# Altium PCB add.PcbDoc
Units mm, origin at the board's own origin, x right, y up, seen from the top; angles counter-clockwise.
Board outline 51.56 x 56.26 mm, 2 copper layers (Top Layer, Bottom Layer); 11 components, 29 nets, 77 pads, 0 vias.
Unrouted connection lines stored in the file: 2.
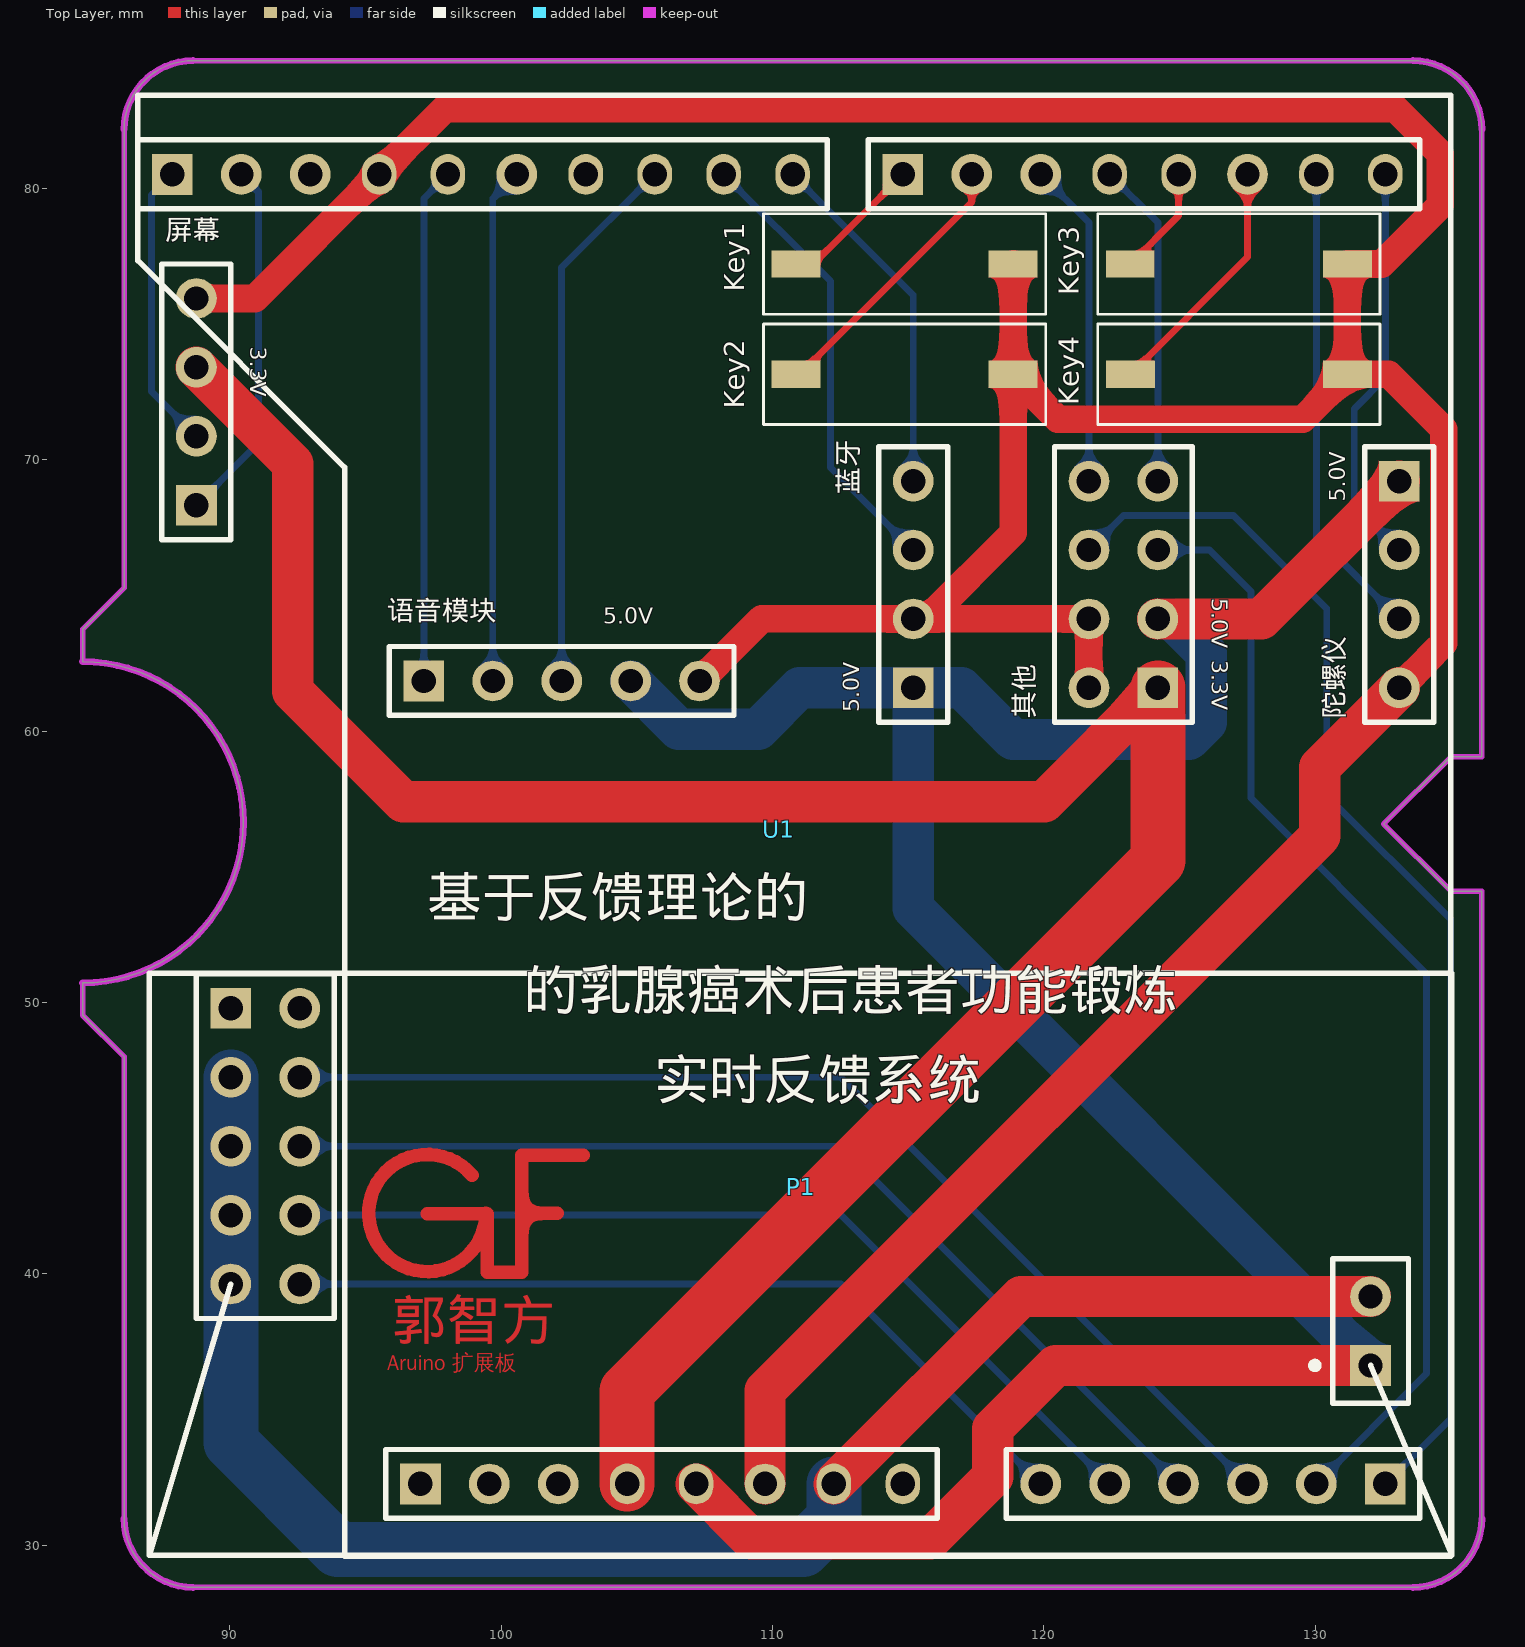
[diagram p0: Top Layer view]
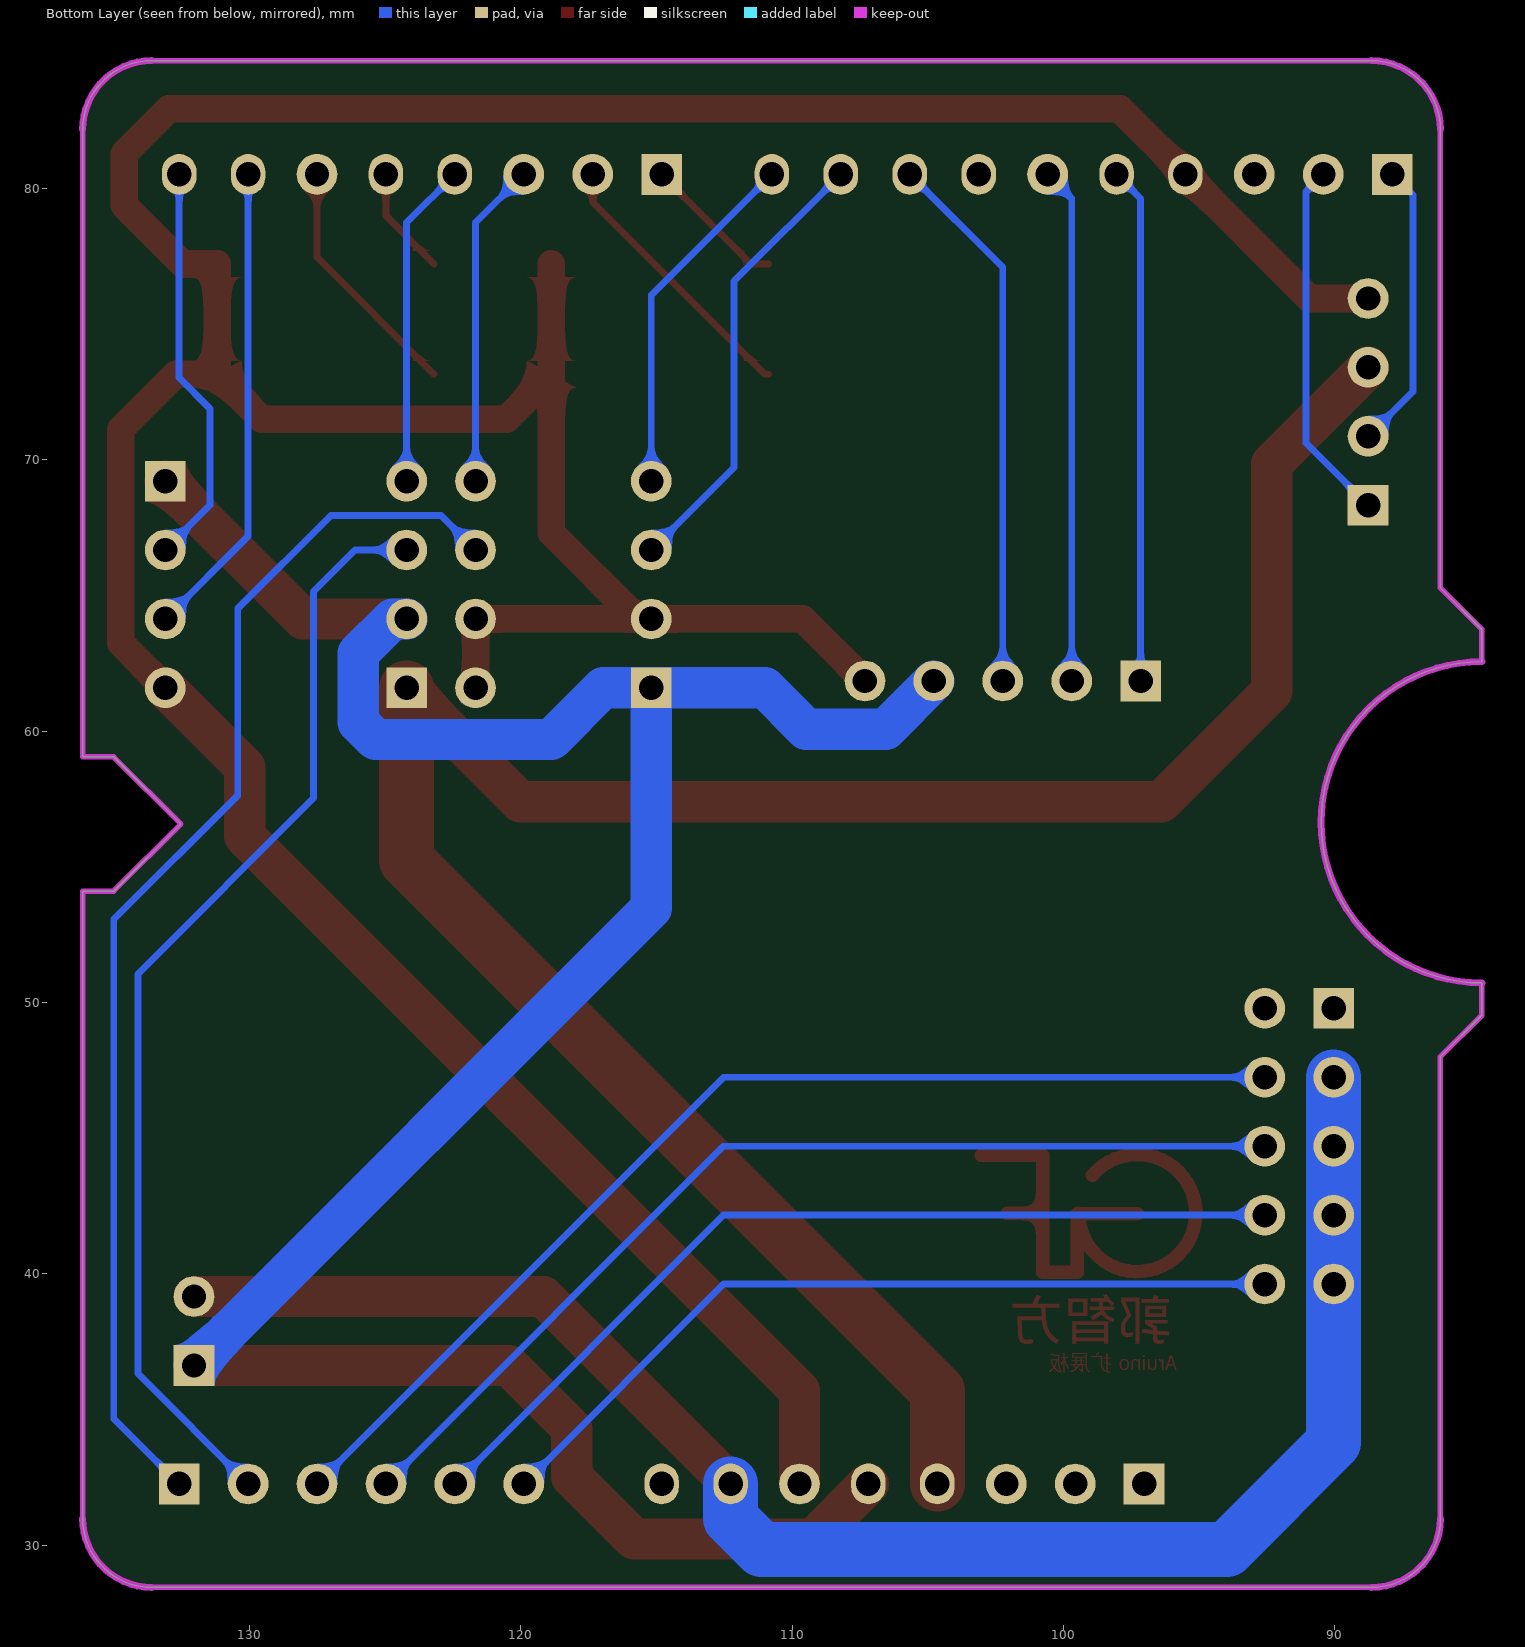
[diagram p1: Bottom Layer view, seen from below]

## Layer stack, top to bottom
Top Solder: solder mask 0.0102, Solder Resist, Dk 3.5
Top Layer: signal copper 0.0356
Dielectric 1: dielectric 0.32, FR-4, Dk 4.8
Bottom Layer: signal copper 0.0356
Bottom Solder: solder mask 0.0102, Solder Resist, Dk 3.5

## Board outline
84.582,49.53 86.106,48.006 86.106,30.988 ccw(c88.646,30.988) 88.646,28.448 133.604,28.448 ccw(c133.604,30.988) 136.144,30.988 136.144,54.102 135.001,54.102 132.524,56.578 135.001,59.055 136.144,59.055 136.144,82.169 ccw(c133.604,82.169) 133.604,84.709 88.646,84.709 ccw(c88.646,82.169) 86.106,82.169 86.106,65.278 84.582,63.754 84.582,62.562 cw(c84.582,56.642) 84.582,50.722

## Design rules (kind name [scope] priority, off if disabled: settings)
Clearance [All] p1: gap=0.254 ignorepadtopadclearanceinfootprint=FALSE except(0: Arc-Hole Track-Hole SMDPad-Hole THPad-Hole Via-Hole Fill-Hole Poly-Hole Region-Hole Text-Hole)
PolygonConnect [All] p1: connectstyle=Relief reliefconductorwidth=0.254 reliefentries=4 polygonreliefangle="90 Angle" airgapwidth=0.254
RoutingVias [All] p1: holewidth=0.711 width=1.27 viastyle="Through Hole" minholewidth=0.711 minwidth=1.27 maxholewidth=0.711 maxwidth=1.27
SolderMaskExpansion [All] p1: expansion=0.102
Width [All] p1: maxlimit=2.54 minlimit=0.254 preferedwidth=0.254
30 further rules are at their usual default settings.

## Components (designator, comment, footprint, x,y, rotation, side; value= is the part's Value field where it differs from the comment)
Key1 "" Key2 110.872,77.216 r0 top
Key2 "" Key2 110.872,73.152 r0 top
Key3 "" Key2 123.19,77.216 r0 top
Key4 "" Key2 123.191,73.152 r0 top
P1 "YL" YL 87.043,29.624 r0 top locked
U1 "ATMEGA328P_32LQFP" ATM 115.57,64.77 r0 top locked
其他 "PIN" HDR2X4 124.206,61.595 r90 top (schematic designator P6)
屏幕 "Screen" HDR1X4 88.773,68.326 r90 top (schematic designator P4)
蓝牙 "Bluetooth" HDR1X4 115.189,61.595 r90 top (schematic designator P5)
语音模块 "MP3" HDR1X5 97.155,61.849 r0 top (schematic designator P2)
陀螺仪 "Gyro" HDR1X4 133.096,69.215 r270 top (schematic designator P3)

## Footprints (in the part's own frame and the unit in brackets; to place one, negate y for a bottom-side part, rotate by r counter-clockwise, add the part's x,y. Pads: shape width x height; smd on the part's side, far side on the other; paste and mask are expansions set on the pad)
ATM [mm]
  rect 1.5x1.5 hole 0.9: 1(-18.542,-32.512) 14(17.018,-32.512) 22(-0.762,15.748) 32(-27.686,15.748)
  round 1.5 hole 0.9: 2(-16.002,-32.512) 3(-13.462,-32.512) 6(-5.842,-32.512) 9(4.318,-32.512) 10(6.858,-32.512) 11(9.398,-32.512) 12(11.938,-32.512) 13(14.478,-32.512) 17(11.938,15.748) 20(4.318,15.748) 21(1.778,15.748) 27(-14.986,15.748) 30(-22.606,15.748) 31(-25.146,15.748)
  oval 1.27x1.5 hole 0.9: 4(-10.922,-32.512) 5(-8.382,-32.512) 7(-3.302,-32.512) 8(-0.762,-32.512) 15(17.018,15.748) 16(14.478,15.748) 18(9.398,15.748) 19(6.858,15.748) 23(-4.826,15.748) 24(-7.366,15.748) 25(-9.906,15.748) 26(-12.446,15.748) 28(-17.526,15.748) 29(-20.066,15.748)
  silkscreen extent -28.96,-35.18 19.43,18.67, body extent -28.96,-33.76 18.29,17, height 8.65
HDR1X4 [mm] "Connector; Header; 4 Position"
  rect 1.5x1.5 hole 0.9: 1(0,0)
  round 1.5 hole 0.9: 2(2.54,0) 3(5.08,0) 4(7.62,0)
  silkscreen extent -1.27,-1.27 8.89,1.27
HDR1X5 [mm] "Connector; Header; 5 Position"
  rect 1.5x1.5 hole 0.9: 1(0,0)
  round 1.5 hole 0.9: 2(2.54,0) 3(5.08,0) 4(7.62,0) 5(10.16,0)
  silkscreen extent -1.27,-1.27 11.43,1.27
HDR2X4 [mm] "Connector; Header; 4x2 Position"
  rect 1.5x1.5 hole 0.9: 1(0,0)
  round 1.5 hole 0.9: 2(0,2.54) 3(2.54,0) 4(2.54,2.54) 5(5.08,0) 6(5.08,2.54) 7(7.62,0) 8(7.62,2.54)
  silkscreen extent -1.27,-1.27 8.89,3.81
Key2 [mm]
  rect 1.8x1 smd: 1(0,0) 2(8,0)
  silkscreen extent -1.2,-1.85 9.2,1.85
YL [mm]
  rect 1.5x1.5 hole 0.9: 1(45,7) 12(3,20.16)
  round 1.5 hole 0.9: 2(45,9.54) 3(5.54,10) 4(5.54,12.54) 5(5.54,15.08) 6(5.54,17.62) 7(5.54,20.16) 8(3,10) 9(3,12.54) 10(3,15.08) 11(3,17.62)
  silkscreen extent 0,0 48,21.46

## Part data
Key1 Key2 Key3 Key4: library part SW-PB, "Switch", LatestRevisionDate=17-Jul-2002, LatestRevisionNote="Re-released for DXP Platform.", PackageDescription="Switch; 2 Leads", PackageReference=SPST-2, Published=24-Mar-1999, Publisher="Altium Limited"
其他: library part "Header 8", "Header, 8-Pin", LatestRevisionDate=17-Jul-2002, LatestRevisionNote="Re-released for DXP Platform.", Publisher="Altium Limited"
屏幕 蓝牙 语音模块 陀螺仪: library part "Header 4", "Header, 4-Pin", LatestRevisionDate=17-Jul-2002, LatestRevisionNote="Re-released for DXP Platform.", Publisher="Altium Limited"

## Nets (pads, with @x,y where several pads share a name; then routed paths per layer and width w, separated by ;. In a path a pad name is that pad's centre, name@x,y a point inside that pad or via, vN(x,y) a via of type N, cw(c..) or ccw(c..) an arc to the next point about the centre after c; other vN are vias at no path point)
2: Key4.1 U1.17 | length 9.2
  Top Layer w0.254: Key4.1 127.508,77.469 U1.17
3: Key3.1 U1.18 | length 4
  Top Layer w0.254: Key3.1 124.968,78.994 U1.18
3.3V: U1.4 其他.1 屏幕.3 | length 86.1
  Top Layer w1.524: 屏幕.3 92.329,69.85 92.329,61.468 96.393,57.404 120.015,57.404 其他.1
  Top Layer w2.032: U1.4 104.648,35.687 124.206,55.245 其他.1
4: U1.19 其他.7 | length 12
  Bottom Layer w0.254: U1.19 124.206,78.74 其他.7
5: U1.20 其他.8 | length 12
  Bottom Layer w0.254: U1.20 121.666,78.74 其他.8
5.0V: P1.1 U1.2 U1.5 其他.3 蓝牙.1 语音模块.4 陀螺仪.1 | length 100.8
  Top Layer w1.524: U1.5 109.22,30.226 115.824,30.226 118.122,32.524 118.122,34.302 120.444,36.624 P1.1 ; 其他.3 128.016,64.135 陀螺仪.1
  Bottom Layer w1.524: 语音模块.4 106.553,60.071 109.474,60.071 110.998,61.595 蓝牙.1 ; 其他.3 124.714,64.135 125.984,62.865 125.984,60.325 125.349,59.69 118.872,59.69 116.967,61.595 蓝牙.1 ; P1.1 115.189,53.478 蓝牙.1
6: Key2.1 U1.21 | length 10.1
  Top Layer w0.254: Key2.1 110.998,73.152 117.348,79.502 U1.21
7: Key1.1 U1.22 | length 5.3
  Top Layer w0.254: Key1.1 111.506,77.216 U1.22
8: U1.23 蓝牙.4 | length 13.1
  Bottom Layer w0.254: U1.23 115.189,76.073 蓝牙.4
9: U1.24 蓝牙.3 | length 16.7
  Bottom Layer w0.254: U1.24 112.141,76.581 112.141,69.723 蓝牙.3
10: U1.25 语音模块.3 | length 20.1
  Bottom Layer w0.254: 语音模块.3 102.235,77.089 U1.25
11: U1.26
12: U1.27 语音模块.2 | length 19
  Bottom Layer w0.254: 语音模块.2 99.695,79.629 U1.27
13: U1.28 语音模块.1 | length 19
  Bottom Layer w0.254: 语音模块.1 97.155,79.629 U1.28
A0: P1.3 U1.9 | length 30.4
  Bottom Layer w0.254: P1.3 112.522,39.624 U1.9
A1: P1.4 U1.10 | length 33.9
  Bottom Layer w0.254: P1.4 112.522,42.164 U1.10
A2: P1.5 U1.11 | length 37.5
  Bottom Layer w0.254: P1.5 112.522,44.704 U1.11
A3: P1.6 U1.12 | length 41.1
  Bottom Layer w0.254: P1.6 112.522,47.244 U1.12
A4: U1.13 其他.5 | length 41.3
  Bottom Layer w0.254: 其他.5 126.111,66.675 127.635,65.151 127.635,57.531 134.112,51.054 134.112,36.322 U1.13
A5: U1.14 其他.6 | length 45.9
  Bottom Layer w0.254: 其他.6 122.936,67.945 127,67.945 130.429,64.516 130.429,57.634 135.001,53.062 135.001,34.671 U1.14
AREF: U1.30
Blank: U1.1
GND: Key1.2 Key2.2 Key3.2 Key4.2 P1.2 P1.8 P1.9 P1.10 P1.11 U1.6 U1.7 U1.29 其他.2 其他.4 屏幕.4 蓝牙.2 语音模块.5 陀螺仪.4 | length 220.8
  Top Layer w1.016: 屏幕.4 90.932,75.946 U1.29 97.917,82.931 132.969,82.931 134.62,81.28 134.62,79.375 132.461,77.216 Key3.2 Key3.2 Key4.2 ; 语音模块.5 109.601,64.135 蓝牙.2 蓝牙.2@115.697,64.135 ; Key2.2@118.872,73.279 Key1.2 ; 其他.2 其他.4 蓝牙.2@115.697,64.135 ; 陀螺仪.4 134.747,63.246 134.747,71.12 132.715,73.152 Key4.2 ; 蓝牙.2@115.697,64.135 118.872,67.31 Key2.2 120.523,71.501 129.54,71.501 Key4.2
  Top Layer w1.524: U1.6 109.728,35.687 130.175,56.134 130.175,58.674 陀螺仪.4 ; U1.7 119.174,39.164 P1.2
  Bottom Layer w2.032: P1.11 P1.10 P1.9 P1.8 90.043,33.782 93.98,29.845 111.125,29.845 112.268,30.988 U1.7
RES: U1.3
RXD: U1.15 陀螺仪.2 | length 15
  Bottom Layer w0.254: U1.15 132.588,73.025 131.445,71.882 131.445,68.326 陀螺仪.2
SCL: U1.32 屏幕.2 | length 10.7
  Bottom Layer w0.254: U1.32 87.122,79.756 87.122,72.517 屏幕.2
SDA: U1.31 屏幕.1 | length 13.4
  Bottom Layer w0.254: 屏幕.1 91.059,70.612 91.059,79.883 U1.31
TXD: U1.16 陀螺仪.3 | length 17.6
  Bottom Layer w0.254: U1.16 130.048,67.183 陀螺仪.3
VIN: U1.8
pads on no net: P1.7 P1.12
copper on no net: | length 25.6
  Top Layer w0.5: 97.282,42.215 99.492,42.215 99.492,40.056 100.762,40.056 100.762,44.374 100.787,44.374 103.022,44.374 ; 98.93,43.635 ccw(c97.282,42.24) 99.441,42.24 ; 100.762,42.227 102.07,42.227

## Keep-outs
Keep-Out Layer:
  the board outline again, w0.254

## Other copper
Top Layer:
  text "郭智方" at 95.987,37.109 h2.5
  text "Aruino 扩展板" at 95.809,36.246 h1

## Silkscreen, mask and mechanical layers (free items; w line width, h text height)
Top Overlay:
  text "3.3V" at 90.551,74.168 h1.02 r270
  text "5.0V" at 131.318,68.453 h1.02 r90
  text "5.0V" at 125.984,64.897 h1.02 r270
  text "5.0V" at 103.759,63.754 h1.02
  text "3.3V" at 125.984,62.611 h1.02 r270
  text "5.0V" at 113.411,60.706 h1.02 r90
  text "基于反馈理论的" at 97.282,52.705 h2.5
  text "的乳腺癌术后患者功能锻炼" at 100.838,49.276 h2.5
  text "实时反馈系统" at 105.664,45.974 h2.5
Top Solder:
  region: 103.378,36.068 103.378,45.339 94.615,45.339 94.615,36.068

## Dimensions
121.92,85.09 to 133.604,28.448 on Mechanical 1
136.144,82.169 to 86.106,65.278 on Mechanical 1